# EAGLE board MRCS-MSS-Detector-Crossover_array (EAGLE 7.7.0)
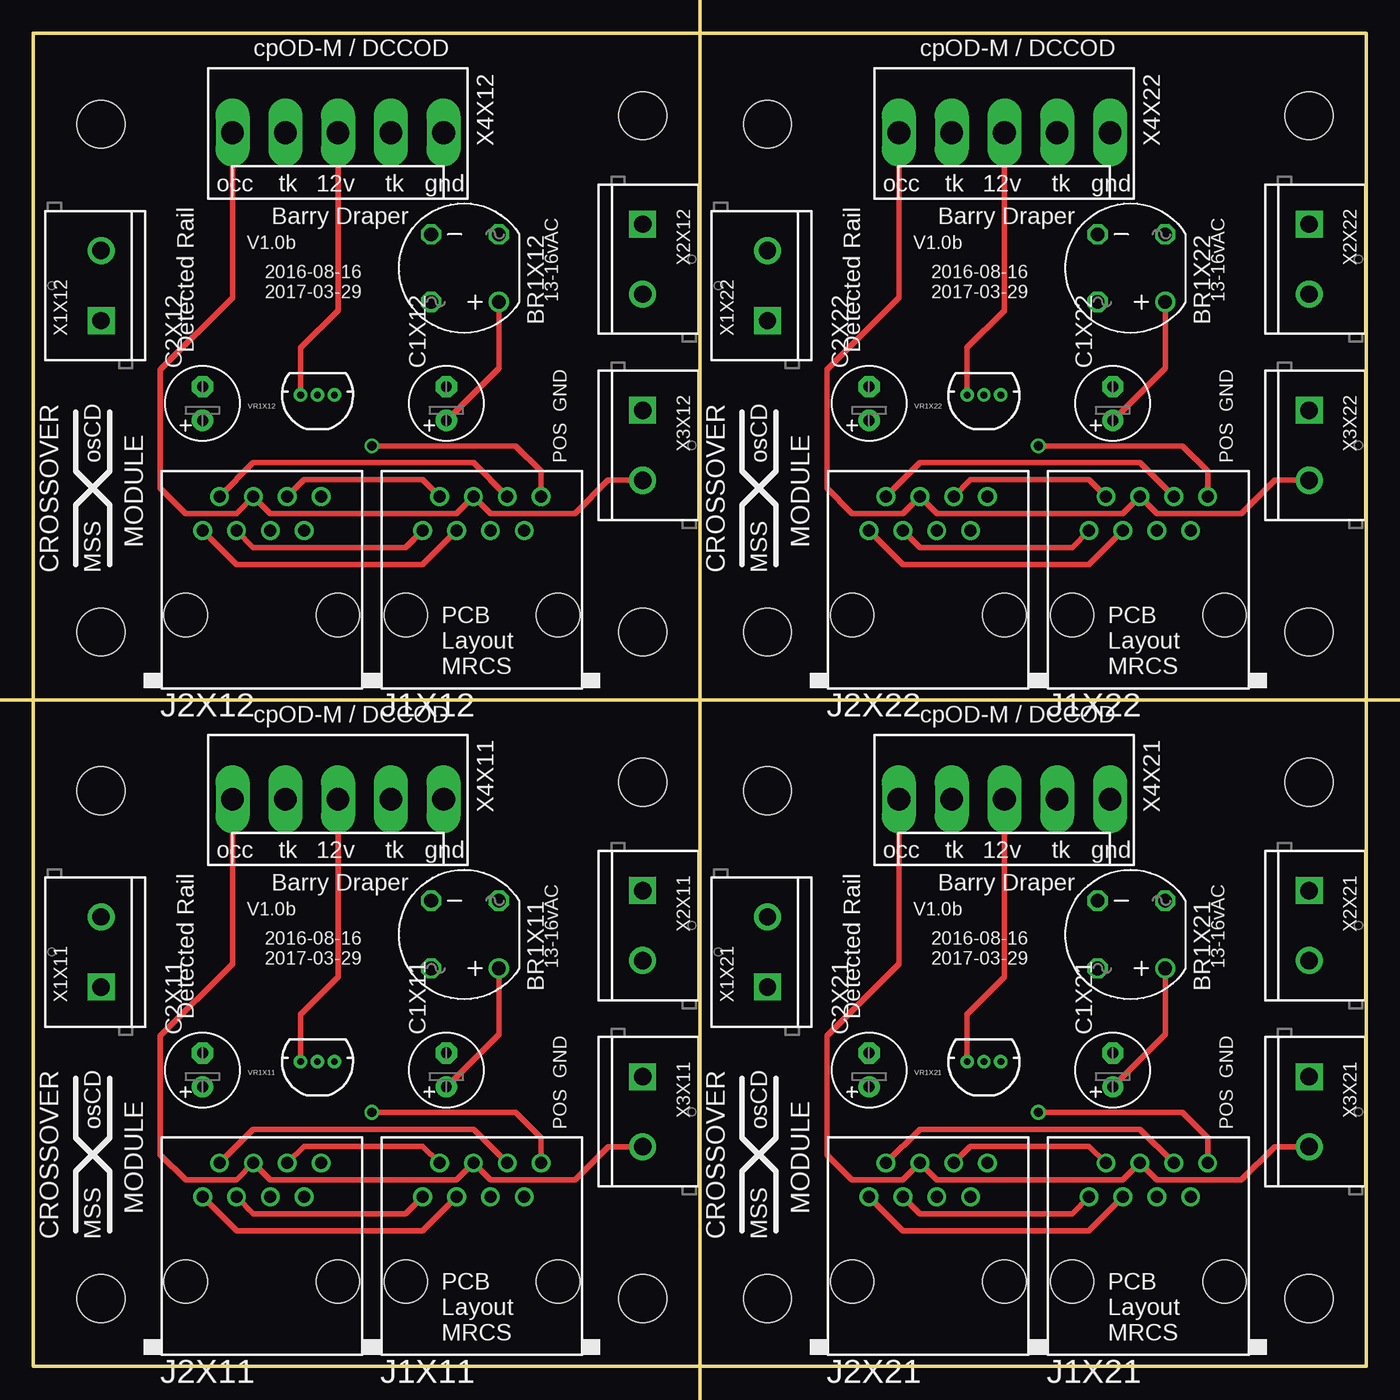
[diagram p0: board, top side]
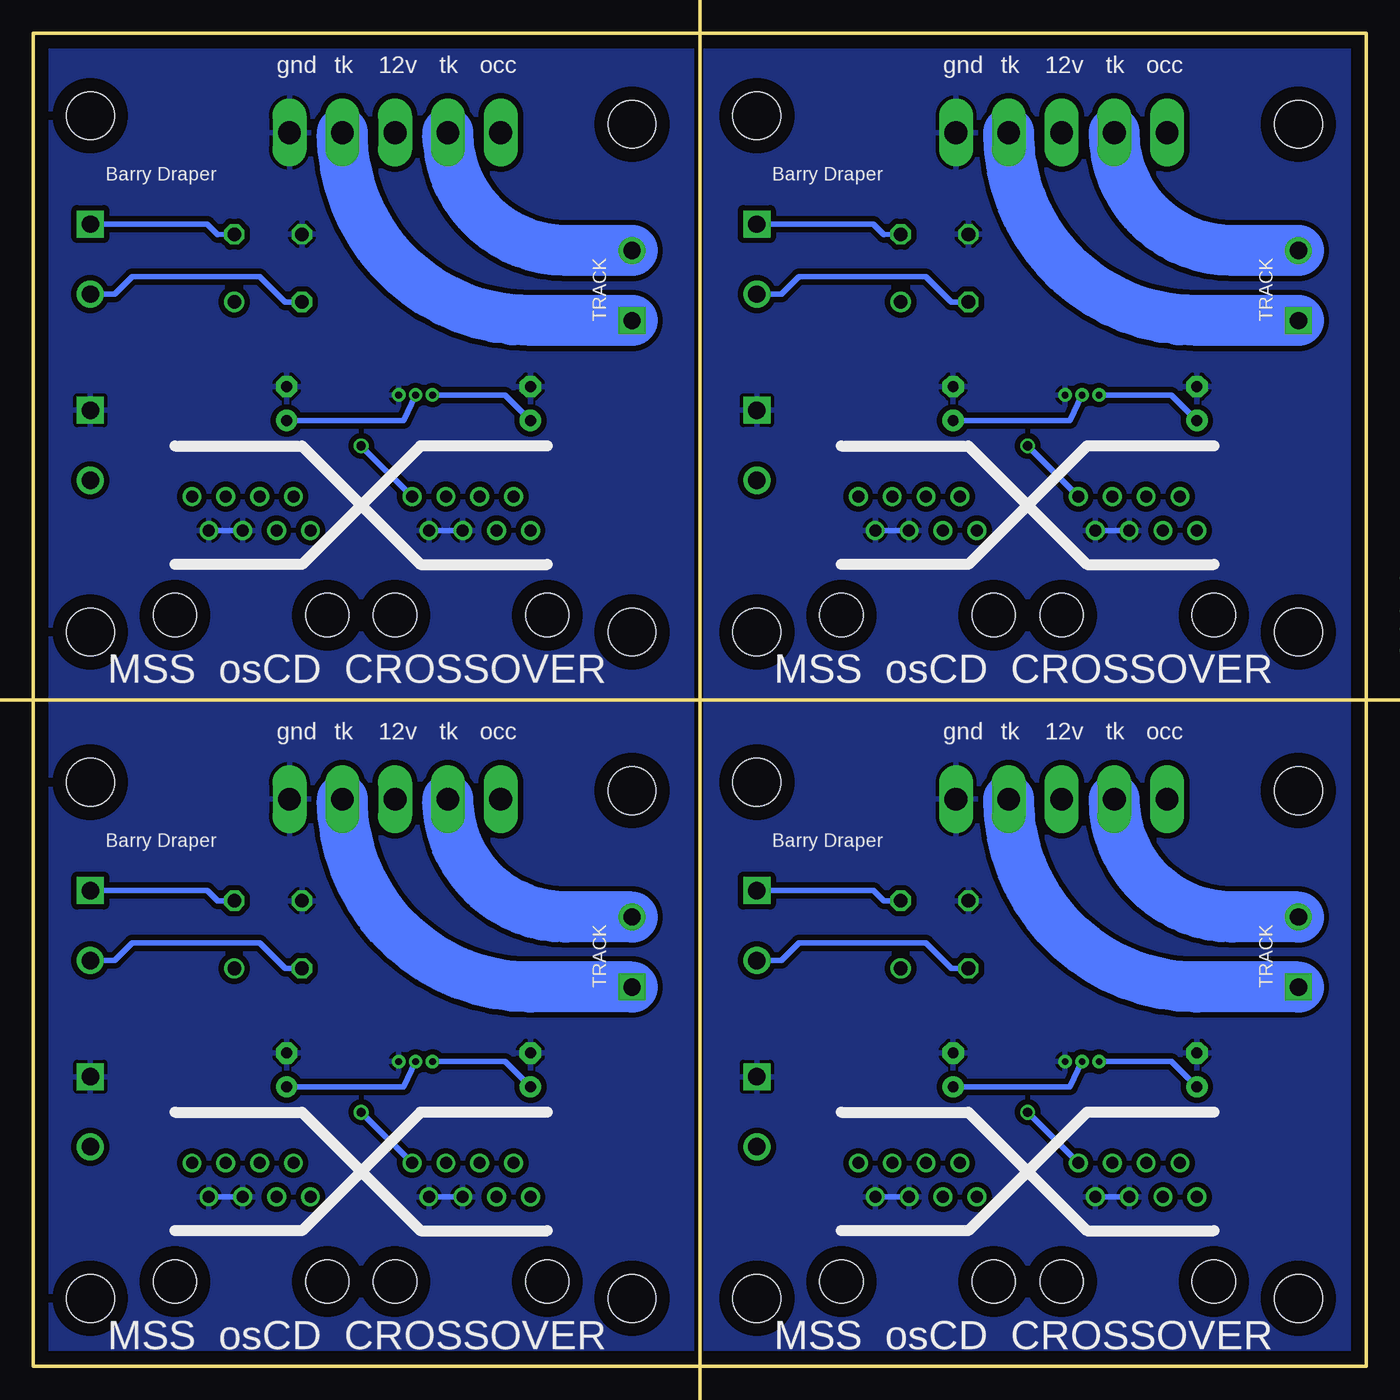
[diagram p1: board, bottom side, seen from below]

Size 100 x 100 mm. Coordinates in mm from the lower left corner, seen from the top.
Outline: 0,0 100,0 100,100 0,100 0,0
Copper layers (1*16): Top 0.035mm / dielectric 1.5mm / Bottom 0.035mm
Design rules "default": minimum track width 10mil, minimum drill 0.6mm, track to track 8mil, track to pad 8mil, pad to pad 8mil, via to via 8mil, smd to smd 8mil, copper to edge 40mil, drill to drill 8mil, minimum pad ring 10mil, minimum via ring 8mil, stop-mask expansion 4mil, vias tented up to drill 0mil, thermal gap 10mil
Holes 3.6 mm at 5.08,43.18 45.72,43.81 45.72,5.08 5.08,5.08 5.08,93.18 45.72,93.81 45.72,55.08 5.08,55.08 55.08,43.18 95.72,43.81 95.72,5.08 55.08,5.08 55.08,93.18 95.72,93.81 95.72,55.08 55.08,55.08
Milling: 2 lines

## Footprints (pad centres in the part's own frame; a part is rotated, then mirrored left to right if it is on the bottom)
RB1A = drill 1.016: + -2.54,2.54 | drill 1.016 octagon: - 2.54,-2.54; AC1 2.54,2.54; AC2 -2.54,-2.54
E2.5-6 = drill 0.813 pad 1.6: + -1.27,0 | drill 0.813 pad 1.6 octagon: - 1.27,0
RJ45-NO-SHIELD = drill 0.9 pad 1.4: 1 -4.445,6.35; 2 -3.175,8.89; 3 -1.905,6.35; 4 -0.635,8.89; 5 0.635,6.35; 6 1.905,8.89; 7 3.175,6.35; 8 4.445,8.89 | hole 3.251: -5.715,0; 5.715,0
TO-92 = drill 0.5: 1 -1.27,0; 2 0,0; 3 1.27,0
SCREWTERMINAL-5MM-2 = drill 1.3 pad 2.032 square: 1 -0.127,0 | drill 1.3 pad 2.032: 2 5.127,0
KK-156-5 = drill 1.7 pad 2.184 long: 1 -7.92,0; 2 -3.96,0; 3 0,0; 4 3.96,0; 5 7.92,0

## Placement (x,y rotation side)
BR1X11  [RB1A]  32.38,32.38 180 top
BR1X12  [RB1A]  32.38,82.39 180 top
BR1X21  [RB1A]  82.39,32.38 180 top
BR1X22  [RB1A]  82.39,82.39 180 top
C1X11  [E2.5-6]  30.99,22.23 90 top
C1X12  [E2.5-6]  30.99,72.22 90 top
C1X21  [E2.5-6]  80.99,22.23 90 top
C1X22  [E2.5-6]  80.99,72.22 90 top
C2X11  [E2.5-6]  12.7,22.23 90 top
C2X12  [E2.5-6]  12.7,72.22 90 top
C2X21  [E2.5-6]  62.7,22.23 90 top
C2X22  [E2.5-6]  62.7,72.22 90 top
J1X11  [RJ45-NO-SHIELD]  33.66,6.35 0 top
J1X12  [RJ45-NO-SHIELD]  33.66,56.35 0 top
J1X21  [RJ45-NO-SHIELD]  83.66,6.35 0 top
J1X22  [RJ45-NO-SHIELD]  83.66,56.35 0 top
J2X11  [RJ45-NO-SHIELD]  17.14,6.35 0 top
J2X12  [RJ45-NO-SHIELD]  17.14,56.35 0 top
J2X21  [RJ45-NO-SHIELD]  67.14,6.35 0 top
J2X22  [RJ45-NO-SHIELD]  67.14,56.35 0 top
VR1X11  [TO-92]  21.32,22.86 180 top
VR1X12  [TO-92]  21.32,72.86 180 top
VR1X21  [TO-92]  71.32,22.86 180 top
VR1X22  [TO-92]  71.32,72.86 180 top
X1X11  [SCREWTERMINAL-5MM-2]  5.08,28.57 90 top
X1X12  [SCREWTERMINAL-5MM-2]  5.08,78.58 90 top
X1X21  [SCREWTERMINAL-5MM-2]  55.08,28.57 90 top
X1X22  [SCREWTERMINAL-5MM-2]  55.08,78.58 90 top
X2X11  [SCREWTERMINAL-5MM-2]  45.72,35.56 270 top
X2X12  [SCREWTERMINAL-5MM-2]  45.72,85.56 270 top
X2X21  [SCREWTERMINAL-5MM-2]  95.72,35.56 270 top
X2X22  [SCREWTERMINAL-5MM-2]  95.72,85.56 270 top
X3X11  [SCREWTERMINAL-5MM-2]  45.72,21.59 270 top
X3X12  [SCREWTERMINAL-5MM-2]  45.72,71.59 270 top
X3X21  [SCREWTERMINAL-5MM-2]  95.72,21.59 270 top
X3X22  [SCREWTERMINAL-5MM-2]  95.72,71.59 270 top
X4X11  [KK-156-5]  22.86,42.55 180 top
X4X12  [KK-156-5]  22.86,92.55 180 top
X4X21  [KK-156-5]  72.86,42.55 180 top
X4X22  [KK-156-5]  72.86,92.55 180 top

## Library data of the parts
BR1X11 BR1X12 BR1X21 BR1X22 C1X11 C1X12 C1X21 C1X22 C2X11 C2X12 C2X21 C2X22 J1X11 J1X12 J1X21 J1X22 J2X11 J2X12 J2X21 J2X22 VR1X11 VR1X12 VR1X21 VR1X22 X1X11 X1X12 X1X21 X1X22 X2X11 X2X12 X2X21 X2X22 X3X11 X3X12 X3X21 X3X22 X4X11 X4X12 X4X21 X4X22 = SPCoast

## Nets
AC1X11: BR1X11.AC1 X2X11.2
AC1X12: BR1X12.AC1 X2X12.2
AC1X21: BR1X21.AC1 X2X21.2
AC1X22: BR1X22.AC1 X2X22.2
AC2X11: BR1X11.AC2 X2X11.1
AC2X12: BR1X12.AC2 X2X12.1
AC2X21: BR1X21.AC2 X2X21.1
AC2X22: BR1X22.AC2 X2X22.1
GNDX11: BR1X11.- C1X11.- C2X11.- J1X11.5 J1X11.7 J2X11.5 J2X11.7 VR1X11.1 X3X11.1 X4X11.1
GNDX12: BR1X12.- C1X12.- C2X12.- J1X12.5 J1X12.7 J2X12.5 J2X12.7 VR1X12.1 X3X12.1 X4X12.1
GNDX21: BR1X21.- C1X21.- C2X21.- J1X21.5 J1X21.7 J2X21.5 J2X21.7 VR1X21.1 X3X21.1 X4X21.1
GNDX22: BR1X22.- C1X22.- C2X22.- J1X22.5 J1X22.7 J2X22.5 J2X22.7 VR1X22.1 X3X22.1 X4X22.1
N$6X11: J1X11.3 J2X11.1
N$6X12: J1X12.3 J2X12.1
N$6X21: J1X21.3 J2X21.1
N$6X22: J1X22.3 J2X22.1
N$8X11: J1X11.6 J2X11.2
N$8X12: J1X12.6 J2X12.2
N$8X21: J1X21.6 J2X21.2
N$8X22: J1X22.6 J2X22.2
N$9X11: J1X11.1 J2X11.3
N$9X12: J1X12.1 J2X12.3
N$9X21: J1X21.1 J2X21.3
N$9X22: J1X22.1 J2X22.3
N$10X11: J1X11.4 J2X11.4 X3X11.2 X4X11.5
N$10X12: J1X12.4 J2X12.4 X3X12.2 X4X12.5
N$10X21: J1X21.4 J2X21.4 X3X21.2 X4X21.5
N$10X22: J1X22.4 J2X22.4 X3X22.2 X4X22.5
N$12X11: J1X11.2 J2X11.6
N$12X12: J1X12.2 J2X12.6
N$12X21: J1X21.2 J2X21.6
N$12X22: J1X22.2 J2X22.6
N$15X11: J1X11.8 J2X11.8
N$15X12: J1X12.8 J2X12.8
N$15X21: J1X21.8 J2X21.8
N$15X22: J1X22.8 J2X22.8
TRACK1X11: X1X11.1 X4X11.2
TRACK1X12: X1X12.1 X4X12.2
TRACK1X21: X1X21.1 X4X21.2
TRACK1X22: X1X22.1 X4X22.2
TRACK2X11: X1X11.2 X4X11.4
TRACK2X12: X1X12.2 X4X12.4
TRACK2X21: X1X21.2 X4X21.4
TRACK2X22: X1X22.2 X4X22.4
V12X11: C2X11.+ VR1X11.3 X4X11.3
V12X12: C2X12.+ VR1X12.3 X4X12.3
V12X21: C2X21.+ VR1X21.3 X4X21.3
V12X22: C2X22.+ VR1X22.3 X4X22.3
VINX11: BR1X11.+ C1X11.+ VR1X11.2
VINX12: BR1X12.+ C1X12.+ VR1X12.2
VINX21: BR1X21.+ C1X21.+ VR1X21.2
VINX22: BR1X22.+ C1X22.+ VR1X22.2

## Tracks (layer width: path | path; a pad name or v marks a point on that pad's centre or on a via)
AC1X11
  Bottom 0.406: BR1X11.AC1 31.11,29.84 33.02,31.75 42.57,31.75 43.89,30.43 X2X11.2
AC1X12
  Bottom 0.406: BR1X12.AC1 31.11,79.84 33.02,81.75 42.57,81.75 43.89,80.43 X2X12.2
AC1X21
  Bottom 0.406: BR1X21.AC1 81.11,29.84 83.02,31.75 92.57,31.75 93.89,30.43 X2X21.2
AC1X22
  Bottom 0.406: BR1X22.AC1 81.11,79.84 83.02,81.75 92.57,81.75 93.89,80.43 X2X22.2
AC2X11
  Bottom 0.406: BR1X11.AC2 36.17,34.9 36.96,35.69 X2X11.1
AC2X12
  Bottom 0.406: BR1X12.AC2 36.17,84.9 36.96,85.69 X2X12.1
AC2X21
  Bottom 0.406: BR1X21.AC2 86.17,34.9 86.96,35.69 X2X21.1
AC2X22
  Bottom 0.406: BR1X22.AC2 86.17,84.9 86.96,85.69 X2X22.1
GNDX11
  Bottom 0.406: J1X11.7 J1X11.5 | J2X11.7 J2X11.5
  pour Bottom (isolate 0.406): 0.64,50.16 0.64,0 49.53,0 49.53,50.16
GNDX12
  Bottom 0.406: J1X12.7 J1X12.5 | J2X12.7 J2X12.5
  pour Bottom (isolate 0.406): 0.64,100.17 0.64,50 49.53,50 49.53,100.17
GNDX21
  Bottom 0.406: J1X21.7 J1X21.5 | J2X21.7 J2X21.5
  pour Bottom (isolate 0.406): 50.63,50.16 50.63,0 99.53,0 99.53,50.16
GNDX22
  Bottom 0.406: J1X22.7 J1X22.5 | J2X22.7 J2X22.5
  pour Bottom (isolate 0.406): 50.63,100.17 50.63,50 99.53,50 99.53,100.17
N$6X11
  Top 0.406: J2X11.1 15.24,10.16 29.21,10.16 J1X11.3
N$6X12
  Top 0.406: J2X12.1 15.24,60.16 29.21,60.16 J1X12.3
N$6X21
  Top 0.406: J2X21.1 65.24,10.16 79.21,10.16 J1X21.3
N$6X22
  Top 0.406: J2X22.1 65.24,60.16 79.21,60.16 J1X22.3
N$8X11
  Top 0.406: J2X11.2 16.51,17.78 33.02,17.78 J1X11.6
N$8X12
  Top 0.406: J2X12.2 16.51,67.78 33.02,67.78 J1X12.6
N$8X21
  Top 0.406: J2X21.2 66.51,17.78 83.02,17.78 J1X21.6
N$8X22
  Top 0.406: J2X22.2 66.51,67.78 83.02,67.78 J1X22.6
N$9X11
  Top 0.406: J2X11.3 16.51,11.43 27.94,11.43 J1X11.1
N$9X12
  Top 0.406: J2X12.3 16.51,61.43 27.94,61.43 J1X12.1
N$9X21
  Top 0.406: J2X21.3 66.51,11.43 77.94,11.43 J1X21.1
N$9X22
  Top 0.406: J2X22.3 66.51,61.43 77.94,61.43 J1X22.1
N$10X11
  Top 0.406: X3X11.2 43.13,16.46 40.64,13.97 34.29,13.97 J1X11.4 31.75,13.97 17.78,13.97 J2X11.4 15.24,13.97 11.43,13.97 9.53,15.88 9.53,24.77 14.94,30.18 X4X11.5
N$10X12
  Top 0.406: X3X12.2 43.13,66.46 40.64,63.97 34.29,63.97 J1X12.4 31.75,63.97 17.78,63.97 J2X12.4 15.24,63.97 11.43,63.97 9.53,65.88 9.53,74.77 14.94,80.18 X4X12.5
N$10X21
  Top 0.406: X3X21.2 93.13,16.46 90.64,13.97 84.29,13.97 J1X21.4 81.75,13.97 67.78,13.97 J2X21.4 65.24,13.97 61.43,13.97 59.52,15.88 59.52,24.77 64.94,30.18 X4X21.5
N$10X22
  Top 0.406: X3X22.2 93.13,66.46 90.64,63.97 84.29,63.97 J1X22.4 81.75,63.97 67.78,63.97 J2X22.4 65.24,63.97 61.43,63.97 59.52,65.88 59.52,74.77 64.94,80.18 X4X22.5
N$12X11
  Top 0.406: J2X11.6 20.32,16.51 29.21,16.51 J1X11.2
N$12X12
  Top 0.406: J2X12.6 20.32,66.51 29.21,66.51 J1X12.2
N$12X21
  Top 0.406: J2X21.6 70.32,16.51 79.21,16.51 J1X21.2
N$12X22
  Top 0.406: J2X22.6 70.32,66.51 79.21,66.51 J1X22.2
N$15X11  (via drill 0.7 pad 1.11)
  Top 0.406: v25.4,19.05 36.2,19.05 38.1,17.14 J1X11.8
  Bottom 0.406: J2X11.8 v25.4,19.05
N$15X12  (via drill 0.7 pad 1.11)
  Top 0.406: v25.4,69.05 36.2,69.05 38.1,67.14 J1X12.8
  Bottom 0.406: J2X12.8 v25.4,69.05
N$15X21  (via drill 0.7 pad 1.11)
  Top 0.406: v75.4,19.05 86.19,19.05 88.1,17.14 J1X21.8
  Bottom 0.406: J2X21.8 v75.4,19.05
N$15X22  (via drill 0.7 pad 1.11)
  Top 0.406: v75.4,69.05 86.19,69.05 88.1,67.14 J1X22.8
  Bottom 0.406: J2X22.8 v75.4,69.05
TRACK1X11
  Bottom 3.81: X1X11.1 12.72,28.45 arc90 X4X11.2
TRACK1X12
  Bottom 3.81: X1X12.1 12.72,78.45 arc90 X4X12.2
TRACK1X21
  Bottom 3.81: X1X21.1 62.72,28.45 arc90 X4X21.2
TRACK1X22
  Bottom 3.81: X1X22.1 62.72,78.45 arc90 X4X22.2
TRACK2X11
  Bottom 3.81: X1X11.2 10.06,33.7 arc90 X4X11.4
TRACK2X12
  Bottom 3.81: X1X12.2 10.06,83.7 arc90 X4X12.4
TRACK2X21
  Bottom 3.81: X1X21.2 60.06,33.7 arc90 X4X21.4
TRACK2X22
  Bottom 3.81: X1X22.2 60.06,83.7 arc90 X4X22.4
V12X11
  Top 0.406: VR1X11.3 20.05,26.4 22.86,29.21 X4X11.3
  Bottom 0.406: C2X11.+ 14.61,22.86 VR1X11.3
V12X12
  Top 0.406: VR1X12.3 20.05,76.4 22.86,79.21 X4X12.3
  Bottom 0.406: C2X12.+ 14.61,72.86 VR1X12.3
V12X21
  Top 0.406: VR1X21.3 70.05,26.4 72.86,29.21 X4X21.3
  Bottom 0.406: C2X21.+ 64.61,22.86 VR1X21.3
V12X22
  Top 0.406: VR1X22.3 70.05,76.4 72.86,79.21 X4X22.3
  Bottom 0.406: C2X22.+ 64.61,72.86 VR1X22.3
VINX11
  Top 0.406: BR1X11.+ 34.92,24.89 C1X11.+
  Bottom 0.406: VR1X11.2 22.23,20.95 C1X11.+
VINX12
  Top 0.406: BR1X12.+ 34.92,74.89 C1X12.+
  Bottom 0.406: VR1X12.2 22.23,70.95 C1X12.+
VINX21
  Top 0.406: BR1X21.+ 84.92,24.89 C1X21.+
  Bottom 0.406: VR1X21.2 72.22,20.95 C1X21.+
VINX22
  Top 0.406: BR1X22.+ 84.92,74.89 C1X22.+
  Bottom 0.406: VR1X22.2 72.22,70.95 C1X22.+

## Text on the board
tPlace: cpOD-M / DCCOD | cpOD-M / DCCOD | occ | tk | 12v | tk | gnd | occ | tk | 12v | tk | gnd | Barry Draper | Barry Draper | V1.0b | V1.0b | 2016-08-16 / 2017-03-29 | 2016-08-16 / 2017-03-29 | 13-16vAC | 13-16vAC | Detected Rail | Detected Rail | osCD | POS GND | osCD | POS GND | MODULE | MODULE | CROSSOVER | MSS | CROSSOVER | MSS | PCB / Layout / MRCS | PCB / Layout / MRCS | cpOD-M / DCCOD | cpOD-M / DCCOD | occ | tk | 12v | tk | gnd | occ | tk | 12v | tk | gnd | Barry Draper | Barry Draper | V1.0b | V1.0b | 2016-08-16 / 2017-03-29 | 2016-08-16 / 2017-03-29 | 13-16vAC | 13-16vAC | Detected Rail | Detected Rail | osCD | POS GND | osCD | POS GND | MODULE | MODULE | CROSSOVER | MSS | CROSSOVER | MSS | PCB / Layout / MRCS | PCB / Layout / MRCS
bPlace: occ | tk | 12v | tk | gnd | occ | tk | 12v | tk | gnd | Barry Draper | Barry Draper | TRACK | TRACK | MSS osCD CROSSOVER | MSS osCD CROSSOVER | occ | tk | 12v | tk | gnd | occ | tk | 12v | tk | gnd | Barry Draper | Barry Draper | TRACK | TRACK | MSS osCD CROSSOVER | MSS osCD CROSSOVER
Milling: V-Score | V-Score
_tNames: X4 | X4 | X2 | X2 | BR1 | BR1 | X1 | X1 | VR1 | VR1 | X3 | X3 | C2 | C1 | C2 | C1 | J2 | J1 | J2 | J1 | X4 | X4 | X2 | X2 | BR1 | BR1 | X1 | X1 | VR1 | VR1 | X3 | X3 | C2 | C1 | C2 | C1 | J2 | J1 | J2 | J1